# Altium PCB W5500¦¯¦t-+ ¦(¦G+¦++.PcbDoc
Units mil, origin at the board's own origin, x right, y up, seen from the top; angles counter-clockwise.
Board outline 6000 x 4000 mil, 2 copper layers (Top Layer, Bottom Layer); 3 components, 0 nets, 36 pads, 0 vias.
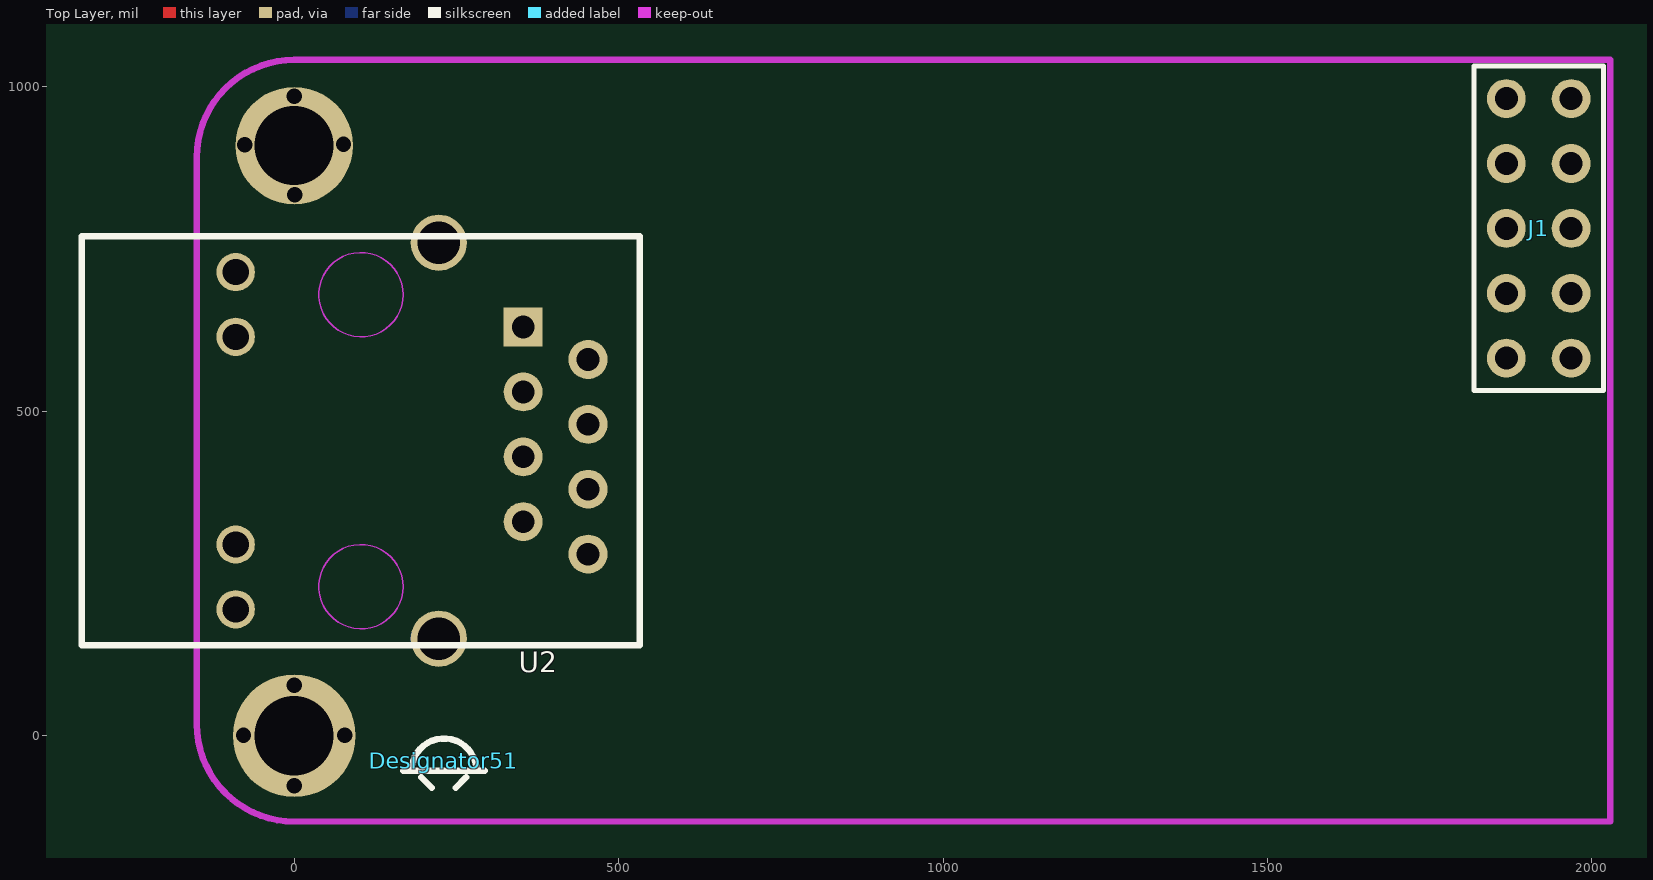
[diagram p0: Top Layer view]
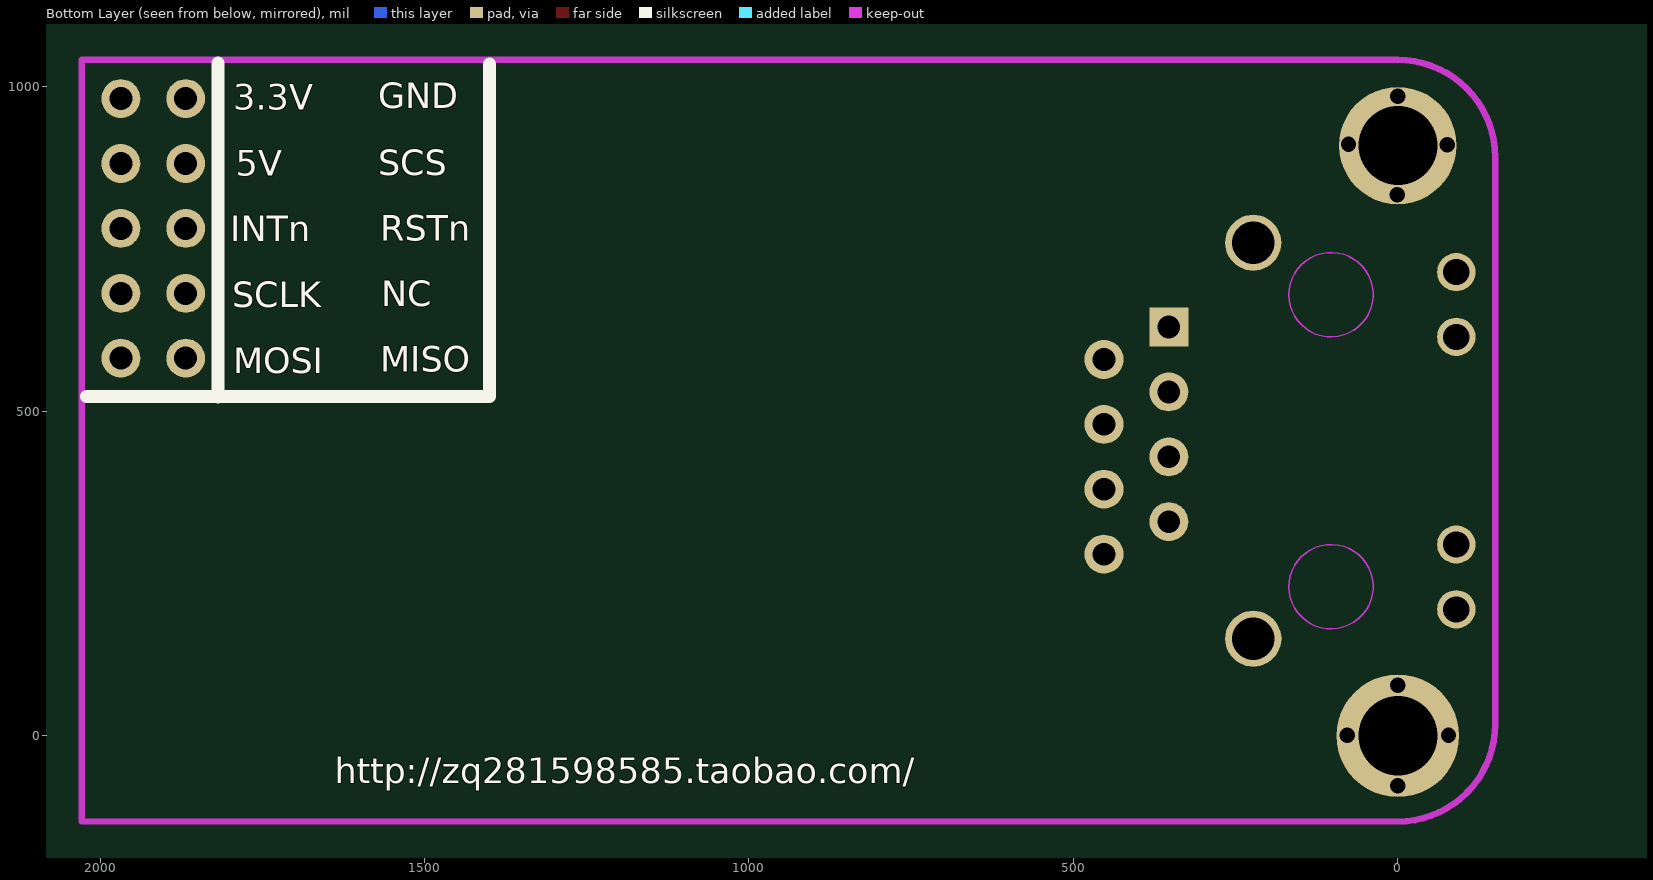
[diagram p1: Bottom Layer view, seen from below]

## Layer stack, top to bottom
Top Layer: signal copper 1.4
Dielectric: dielectric 12.6, FR-4, Dk 4.8
Bottom Layer: signal copper 1.4

## Board outline
-2342.09,-1435.16 3657.91,-1435.16 3657.91,2564.84 -2342.09,2564.84

## Design rules (kind name [scope] priority, off if disabled: settings)
Clearance [All] p1: gap=9
ComponentClearance [All] p1 off: gap=10 collisioncheckmode=3 verticalgap=10 showdistances=FALSE
PolygonConnect [All] p1: connectstyle=Relief reliefconductorwidth=20 reliefentries=4 polygonreliefangle="90 Angle"
RoutingVias [All] p1: holewidth=15.75 width=29.53 viastyle="Through Hole" minholewidth=15.75 minwidth=29.53 maxholewidth=15.75 maxwidth=29.53
SilkscreenOverComponentPads [All] p1: minsilkscreentomaskgap=10
SolderMaskExpansion [All] p1: expansion=4
Width [All] p1: maxlimit=60 minlimit=8 preferedwidth=10
26 further rules are at their usual default settings.

## Classes and differential pairs
component class w5500: J1 U2

## Components (designator, comment, footprint, x,y, rotation, side; value= is the part's Value field where it differs from the comment)
Designator51 "Comment" TB2 174,-54 r0 top
J1 "J2x5" PZ2*5 1968,582 r90 top
U2 "HR911105A" HR911105A 102.91,454.84 r90 top locked

## Footprints (in the part's own frame and the unit in brackets; to place one, negate y for a bottom-side part, rotate by r counter-clockwise, add the part's x,y. Pads: shape width x height; smd on the part's side, far side on the other; paste and mask are expansions set on the pad)
HR911105A [mm]
  rect 1.524x1.524 hole 0.889: 1(4.45,-6.35)
  round 1.524 hole 0.889: 2(3.18,-8.89) 3(1.91,-6.35) 4(0.64,-8.89) 5(-0.63,-6.35) 6(-1.9,-8.89) 7(-3.17,-6.35) 8(-4.44,-8.89)
  round 1.5 hole 1.02: 9(6.6,4.9) 10(4.064,4.9) 11(-4.064,4.9) 12(-6.6,4.9)
  round 2.2 hole 1.65: 13(7.75,-3.048) 14(-7.75,-3.048)
  Keep-Out Layer circle w0.051: c5.716,0 r1.65
  Keep-Out Layer circle w0.051: c-5.714,0 r1.65
  silkscreen extent -8,-10.92 8,10.92
PZ2*5 [mil]
  round 60 hole 35.43: 1(0,0) 2(100,0) 3(200,0) 4(300,0) 5(400,0) 6(400,100) 7(300,100) 8(200,100) 9(100,100) 10(0,100)
  silkscreen extent -50,-50 450,150
TB2 [mil]
  round 20 on Top Overlay: 1(31,16) 2(82,16)
  silkscreen extent -6,-26 120,50

## Free pads (board coordinates)
  round 188.98 hole 122.05: 1(0,0)
  round 181.1 hole 122.05: 1(0,909.69)
  round 23.62 hole 23.62: 12(-78,1) 12(-76,910.69) 12(0,-77) 12(0,78) 12(0,985.69) 12(1,833.69) 12(76,911.69) 12(78,1)

## Nets (pads, with @x,y where several pads share a name; then routed paths per layer and width w, separated by ;. In a path a pad name is that pad's centre, name@x,y a point inside that pad or via, vN(x,y) a via of type N, cw(c..) or ccw(c..) an arc to the next point about the centre after c; other vN are vias at no path point)
pads on no net: Designator51.1 Designator51.2 J1.1 J1.2 J1.3 J1.4 J1.5 J1.6 J1.7 J1.8 J1.9 J1.10 U2.1 U2.2 U2.3 U2.4 U2.5 U2.6 U2.7 U2.8 U2.9 U2.10 U2.11 U2.12 U2.13 U2.14
copper on no net: | length 170.6
  Top Layer w15: 352.91,630.04 367.84,644.96
  Bottom Layer w15: 352.91,630.04 361.87,639
  Bottom Layer w20: 0,934.69 8.32,943 ; 222.91,149.72 243.19,170
  Bottom Layer w40: 0,-25 24,-25 ; 0,934.69 48.19,934.69 ; 198.72,149.72 222.91,149.72

## Keep-outs
Keep-Out Layer:
  lines w10: -150,891.69 cw(c0,891.69) 0,1041.69 43,1041.69 2028,1041.69 2028,-132 0,-132 cw(c0,18) -150,18 -150,895.69

## Silkscreen, mask and mechanical layers (free items; w line width, h text height)
Bottom Overlay:
  lines w20: 1400,1035 1400,523 2021,523 ; 1818,522 1818,1037
  text "GND" at 1571,967 h39.37
  text "3.3V" at 1795,965 h39.37
  text "SCS" at 1571,864 h39.37
  text "5V" at 1791,863 h39.37
  text "RSTn" at 1568,763 h39.37
  text "INTn" at 1799.23,762 h39.37
  text "NC" at 1567,662 h39.37
  text "SCLK" at 1796,660.5 h39.37
  text "MISO" at 1568,561 h39.37
  text "MOSI" at 1795,559 h39.37
  text "http://zq281598585.taobao.com/" at 1638,-73 h39.37